# Altium PCB 三人小组v2.PCBDOC
Units mm, origin at the board's own origin, x right, y up, seen from the top; angles counter-clockwise.
Board outline 113.79 x 81.66 mm, 2 copper layers (Top Layer, Bottom Layer); 25 components, 31 nets, 102 pads, 0 vias.
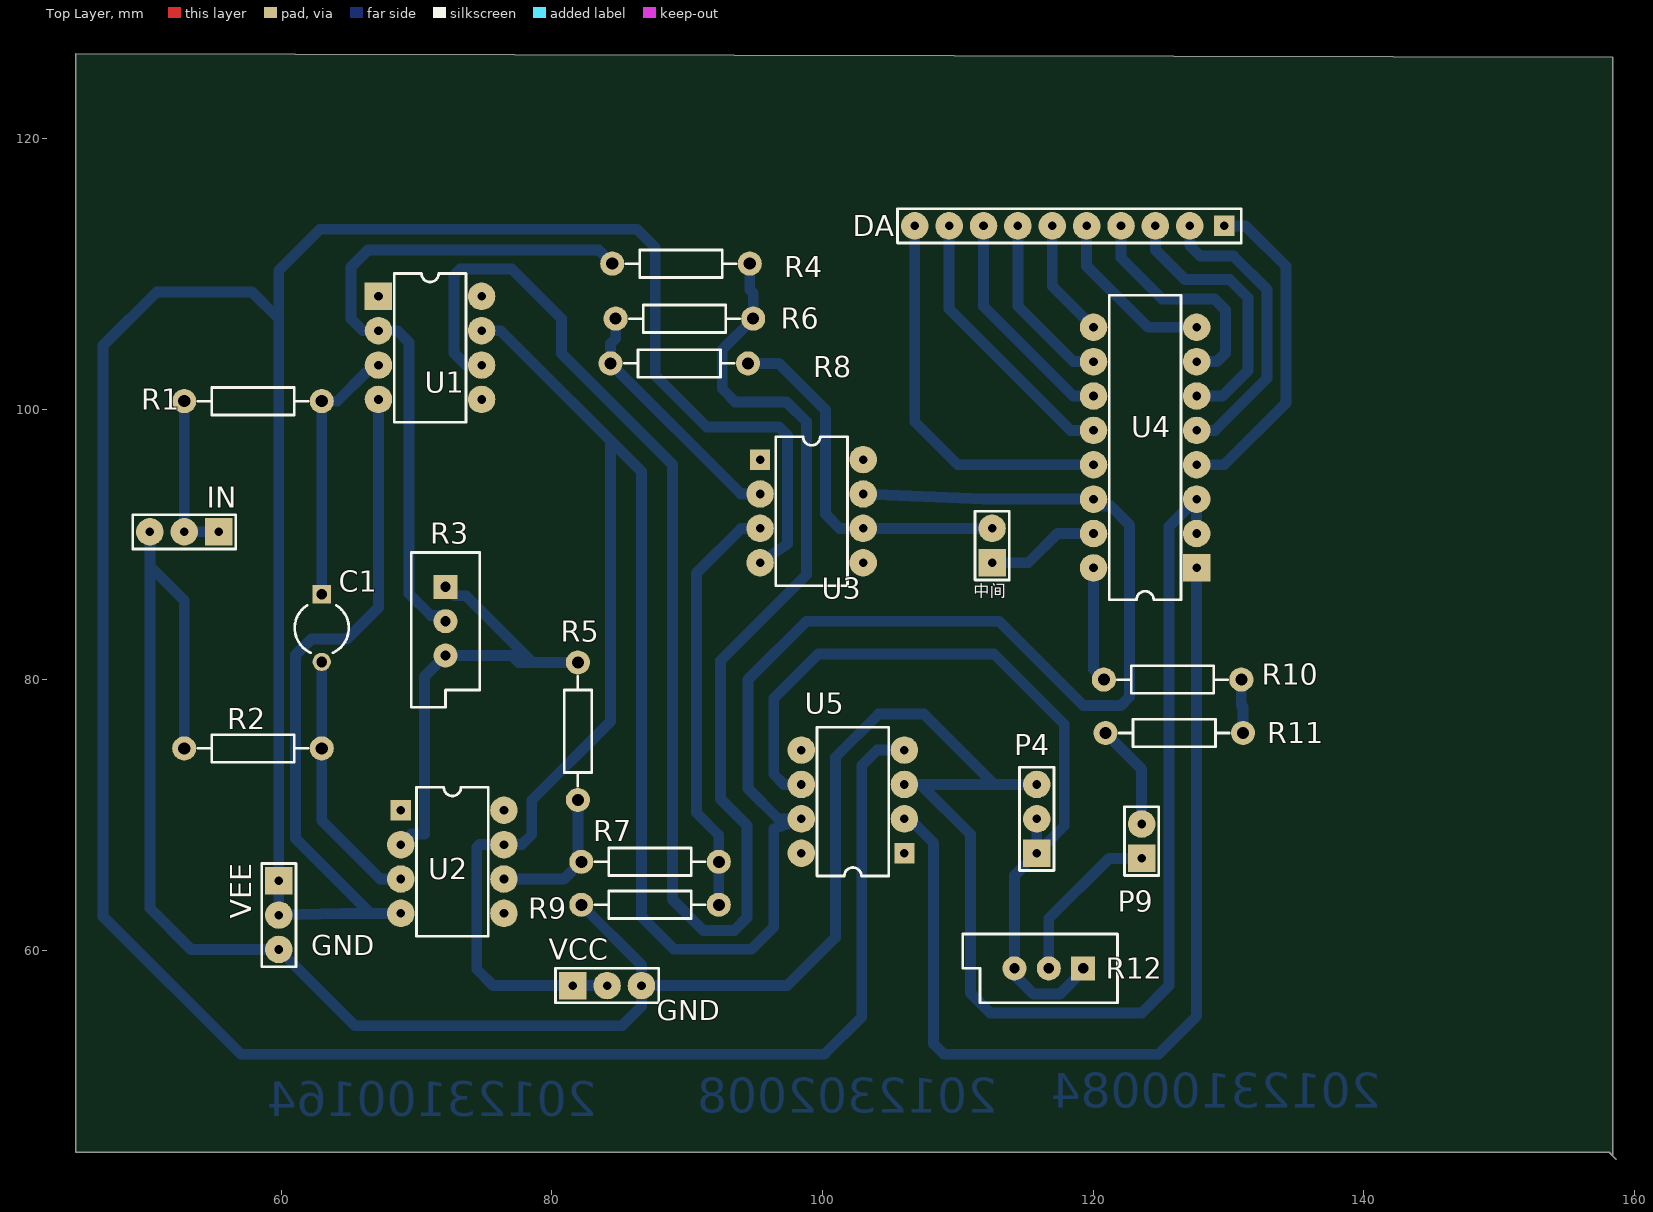
[diagram p0: Top Layer view]
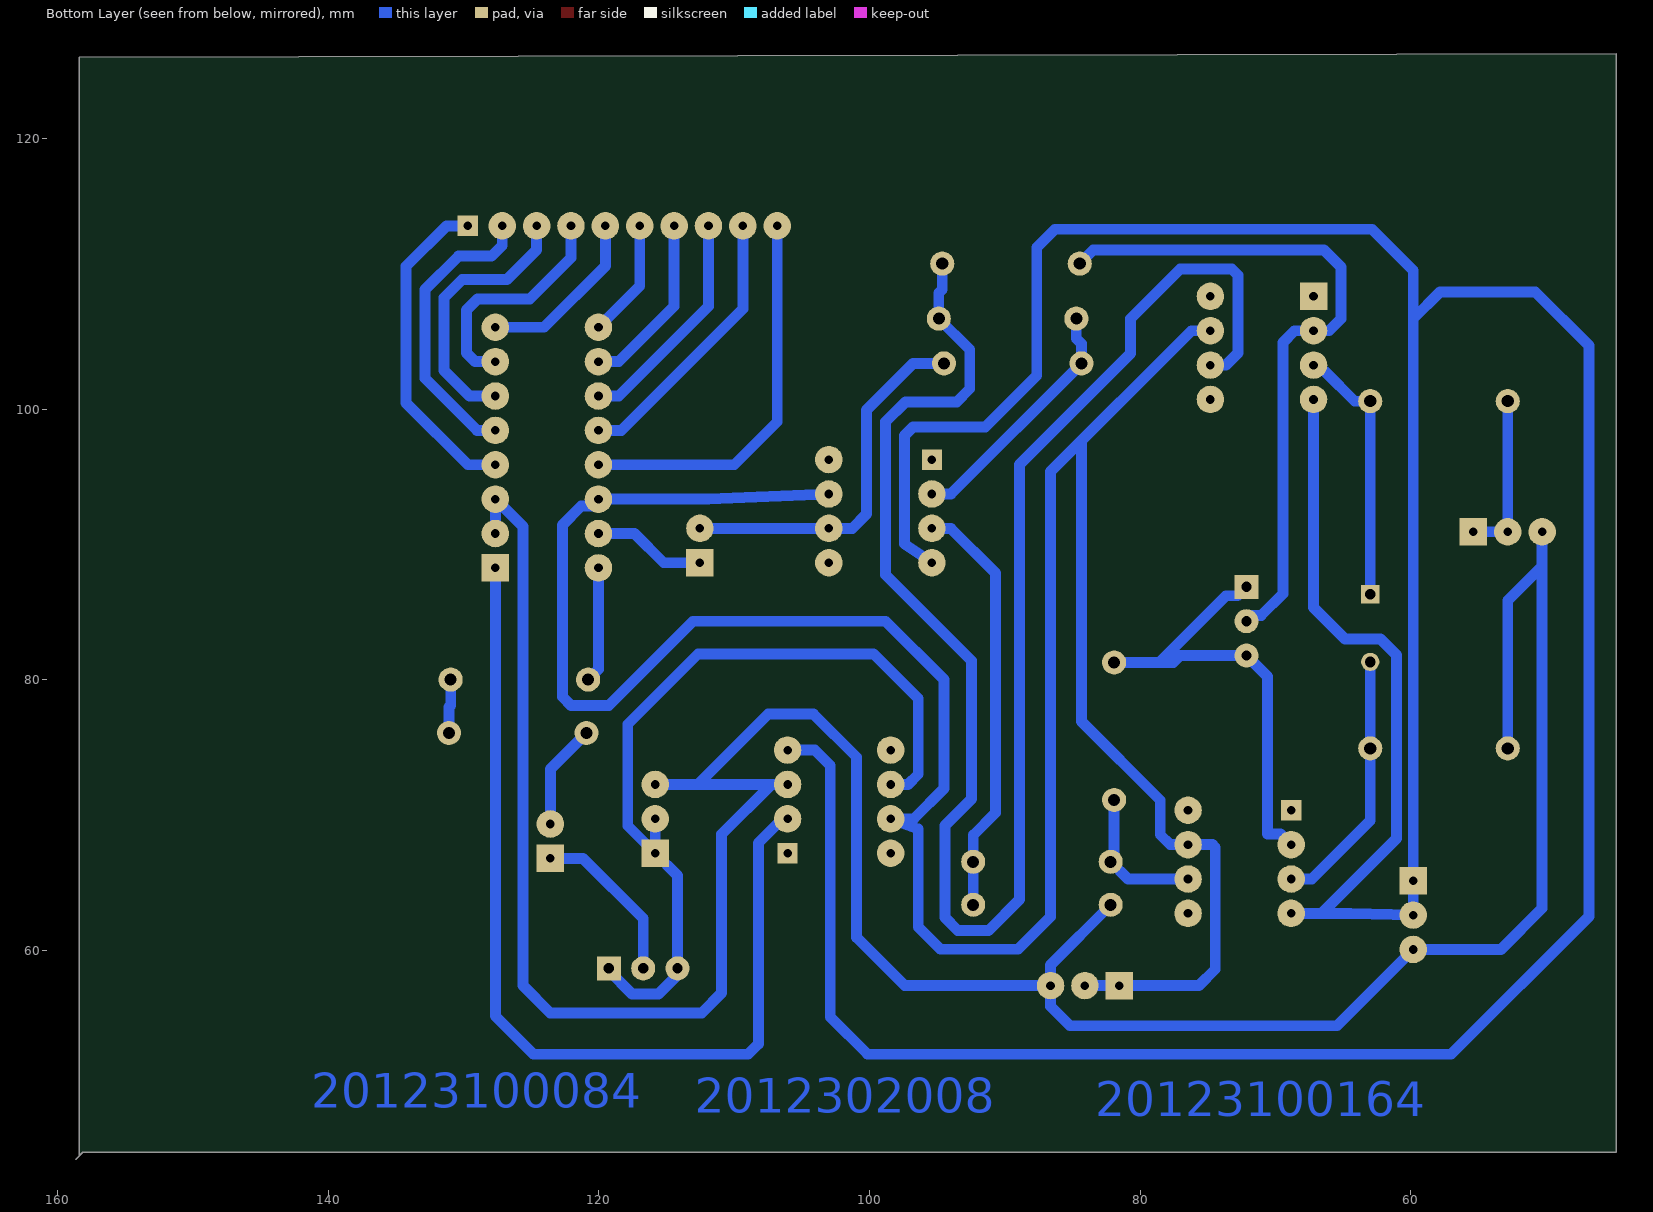
[diagram p1: Bottom Layer view, seen from below]

## Layer stack, top to bottom
Top Layer: signal copper 0.0356
Dielectric: dielectric 0.32, FR-4, Dk 4.8
Bottom Layer: signal copper 0.0356

## Board outline
44.831,126.238 44.831,45.085 158.115,45.085 158.623,44.577 158.369,44.831 158.369,125.984

## Design rules (kind name [scope] priority, off if disabled: settings)
Clearance [All] p1: gap=0.6
FabricationTestPointUsage TestPointUsage [All] p1: valid=0 allowmultiple=FALSE
FabricationTestpoint Testpoint [All] p1: side=3 testpointundercomponent=TRUE minsize=1.016 maxsize=2.54 preferedsize=1.524 minholesize=0 maxholesize=1.016 preferedholesize=0.813 testpointgrid=0.025 allowsidetop=TRUE allowsidebottom=TRUE usegrid=TRUE gridtolerance=0
PolygonConnect [All] p1: connectstyle=Relief reliefconductorwidth=0.254 reliefentries=4 polygonreliefangle="90 Angle" airgapwidth=0.254
RoutingLayers [All] p1: top layer_v5=FALSE bottom layer_v5=TRUE
RoutingVias [All] p1: holewidth=0.711 width=1.27 viastyle="Through Hole" minholewidth=0.711 minwidth=1.27 maxholewidth=0.711 maxwidth=1.27
SolderMaskExpansion [All] p1: expansion=0.102
Width [All] p1: maxlimit=0.8 minlimit=0.8 preferedwidth=0.8
25 further rules are at their usual default settings.

## Components (designator, comment, footprint, x,y, rotation, side; value= is the part's Value field where it differs from the comment)
C1 "Cap2" CAPR5-4X5 62.992,83.82 r270 top
DA "Header 10" HDR1X10 129.667,113.538 r180 top (schematic designator P7)
IN "Header 3" HDR1X3 55.372,90.932 r180 top (schematic designator P1)
P4 "Header 3" HDR1X3 115.824,67.183 r90 top
P9 "Header 2" HDR1X2 123.571,66.802 r90 top
R1 "Res2" AXIAL-0.4 57.912,100.584 r0 top
R2 "Res2" AXIAL-0.4 57.912,74.93 r0 top
R3 "RPot" VR5 72.136,84.328 r270 top
R4 "Res2" AXIAL-0.4 89.535,110.744 r0 top
R5 "Res2" AXIAL-0.4 81.915,76.2 r90 top
R6 "Res2" AXIAL-0.4 89.789,106.68 r180 top
R7 "Res2" AXIAL-0.4 87.249,66.548 r0 top
R8 "Res2" AXIAL-0.4 89.408,103.378 r0 top
R9 "Res2" AXIAL-0.4 87.249,63.373 r0 top
R10 "Res2" AXIAL-0.4 125.857,80.01 r0 top
R11 "Res2" AXIAL-0.4 125.984,76.073 r180 top
R12 "RPot" VR5 116.713,58.674 r180 top
U1 "OP07EP" N-8_A#1 70.993,104.521 r270 top
U2 "OP07EP" N-8_A#2 72.644,66.548 r270 top
U3 "OP07EP" N-8_A#2 99.187,92.456 r270 top
U4 "DAC1020LCN" N16A 123.825,97.155 r90 top
U5 "OP07EP" N-8_A#2 102.235,70.993 r90 top
VCC "Header 3" HDR1X3 81.534,57.404 r0 top (schematic designator P5)
VEE "Header 3" HDR1X3 59.817,65.151 r270 top (schematic designator P6)
中间 "Header 2" HDR1X2 112.522,88.646 r90 top (schematic designator P3)

## Footprints (in the part's own frame and the unit in brackets; to place one, negate y for a bottom-side part, rotate by r counter-clockwise, add the part's x,y. Pads: shape width x height; smd on the part's side, far side on the other; paste and mask are expansions set on the pad)
AXIAL-0.4 [mil] "Resistor; 2 Leads"
  round 70 hole 35: 1(-200,0) 2(200,0)
  silkscreen extent -160,-40 160,40
CAPR5-4X5 [mm] "Capacitor; 2 Leads"
  rect 1.35x1.35 hole 0.8: 1(-2.5,0)
  round 1.35 hole 0.8: 2(2.5,0)
  silkscreen extent -1.69,-2 1.82,2
HDR1X2 [mil] "Connector; Header; 2 Position"
  rect 80x80 hole 25: 1(0,0)
  round 80 hole 25: 2(100,0)
  silkscreen extent -50,-50 150,50
HDR1X3 [mil] "Connector; Header; 3 Position"
  rect 80x80 hole 25: 1(0,0)
  round 80 hole 25: 2(100,0) 3(200,0)
  silkscreen extent -50,-50 250,50
HDR1X10 [mil] "Connector; Header; 10 Position"
  rect 59x59 hole 25: 1(0,0)
  round 80 hole 25: 2(100,0) 3(200,0) 4(300,0) 5(400,0) 6(500,0) 7(600,0) 8(700,0) 9(800,0) 10(900,0)
  silkscreen extent -50,-50 950,50
N16A [mil] "DIP; 16 Leads; Row Spacing 7.62 mm; Pitch 2.54 mm"
  rect 80x80 hole 25: 1(-350,-150)
  round 80 hole 25: 2(-250,-150) 3(-150,-150) 4(-50,-150) 5(50,-150) 6(150,-150) 7(250,-150) 8(350,-150) 9(350,150) 10(250,150) 11(150,150) 12(50,150) 13(-50,150) 14(-150,150) 15(-250,150) 16(-350,150)
  silkscreen extent -443,-104 443,104
N-8_A#1 [mil] "DIP; 8 Leads; Row Spacing 7.62 mm; Pitch 2.54 mm"
  rect 80x80 hole 25: 1(-150,-150)
  round 80 hole 25: 2(-50,-150) 3(50,-150) 4(150,-150) 5(150,150) 6(50,150) 7(-50,150) 8(-150,150)
  silkscreen extent -217,-104 217,104
N-8_A#2 [mil] "DIP; 8 Leads; Row Spacing 7.62 mm; Pitch 2.54 mm"
  rect 59x59 hole 25: 1(-150,-150)
  round 80 hole 25: 2(-50,-150) 3(50,-150) 4(150,-150) 5(150,150) 6(50,150) 7(-50,150) 8(-150,150)
  silkscreen extent -217,-104 217,104
VR5 [mil] "Potentiometer; 3 Leads"
  rect 70x70 hole 30: 1(-100,0)
  round 70 hole 30: 2(0,0) 3(100,0)
  silkscreen extent -200,-100 250,100

## Part data
C1: "Capacitor"
DA: "Header, 10-Pin"
IN P4 VCC VEE: "Header, 3-Pin"
P9 中间: "Header, 2-Pin"
R1 R2 R4 R5 R6 R7 R8 R9 R10 R11: "Resistor"
R3 R12: "Potentiometer"
U1 U2 U3 U5: "Ultra-Low Offset Voltage Operational Amplifier"
U4: "10-Bit Binary Multiplying D/A Converter"

## Nets (pads, with @x,y where several pads share a name; then routed paths per layer and width w, separated by ;. In a path a pad name is that pad's centre, name@x,y a point inside that pad or via, vN(x,y) a via of type N, cw(c..) or ccw(c..) an arc to the next point about the centre after c; other vN are vias at no path point)
GND: IN.3 P4.3 R9.1 U4.2 U4.3 U5.3 VCC.3 VEE.3 | length 210.8
  Bottom Layer w0.8: IN.3 50.292,88.392 ; 52.832,82.804 52.832,85.852 50.292,88.392 ; R9.1 86.614,58.928 VCC.3 ; U5.3 107.239,72.263 ; P4.3 112.674,72.263 ; U4.2 U4.3 125.603,91.313 125.603,57.404 123.584,55.385 112.382,55.385 110.922,56.845 110.922,68.58 107.239,72.263 ; 50.292,88.392 50.292,63.119 53.34,60.071 VEE.3 65.456,54.432 85.166,54.432 86.614,55.88 VCC.3 ; VCC.3 97.384,57.404 100.94,60.96 100.94,74.27 104.14,77.47 107.467,77.47 112.674,72.263 ; 107.239,72.263 112.674,72.263
NetC1_1: C1.1 R1.2 U1.3 | length 19.5
  Bottom Layer w0.8: C1.1 R1.2 64.135,100.584 66.294,102.743 U1.3
NetC1_2: C1.2 R2.2 U2.3 | length 19.4
  Bottom Layer w0.8: C1.2 R2.2 62.992,69.596 67.31,65.278 U2.3
NetP1_1: IN.1 IN.2 R1.1 | length 12.2
  Bottom Layer w0.8: R1.1 IN.2 IN.1
NetP2_2: R2.1 | length 7.9
  Bottom Layer w0.8: R2.1 52.832,82.804
NetP3_1: U4.15 中间.1 | length 8.4
  Bottom Layer w0.8: 中间.1 115.189,88.646 117.348,90.805 U4.15
NetP3_2: R8.2 U3.6 中间.2 | length 27.6
  Bottom Layer w0.8: R8.2 96.774,103.378 100.209,99.943 100.209,92.248 101.271,91.186 U3.6 中间.2
NetP4_1: P4.1 P4.2 R12.1 R12.3 U5.6 | length 62.1
  Bottom Layer w0.8: U5.6 97.155,72.263 96.393,73.025 96.393,78.613 99.695,81.915 112.649,81.915 117.856,76.708 117.856,69.215 P4.1 ; P4.2 P4.1 ; R12.1 119.253,58.507 117.531,56.785 115.57,56.785 114.173,58.182 R12.3 114.173,65.532 P4.1
NetP7_1: DA.1 U4.4 | length 24.4
  Bottom Layer w0.8: U4.4 129.667,95.885 134.229,100.447 134.229,110.551 131.241,113.538 DA.1
NetP7_2: DA.2 U4.5 | length 21.8
  Bottom Layer w0.8: DA.2 127.127,112.087 127.914,111.299 130.356,111.299 132.829,108.827 132.829,102.274 128.98,98.425 U4.5
NetP7_3: DA.3 U4.6 | length 20
  Bottom Layer w0.8: DA.3 124.587,111.76 126.78,109.567 130.082,109.567 131.429,108.22 131.429,102.854 129.54,100.965 U4.6
NetP7_4: DA.4 U4.7 | length 17.3
  Bottom Layer w0.8: DA.4 122.047,111.176 125.095,108.128 128.956,108.128 129.769,107.315 129.769,104.14 129.134,103.505 U4.7
NetP7_5: DA.5 U4.8 | length 13
  Bottom Layer w0.8: DA.5 119.507,110.576 124.038,106.045 U4.8
NetP7_6: DA.6 U4.9 | length 8.8
  Bottom Layer w0.8: DA.6 116.967,109.093 U4.9
NetP7_7: DA.7 U4.10 | length 13.2
  Bottom Layer w0.8: DA.7 114.427,107.594 118.516,103.505 U4.10
NetP7_8: DA.8 U4.11 | length 16.8
  Bottom Layer w0.8: DA.8 111.887,107.594 118.516,100.965 U4.11
NetP7_9: DA.9 U4.12 | length 20.5
  Bottom Layer w0.8: DA.9 109.347,107.417 118.339,98.425 U4.12
NetP7_10: DA.10 U4.13 | length 29
  Bottom Layer w0.8: DA.10 106.807,99.06 109.982,95.885 U4.13
NetP8_1: R10.2 R11.1 | length 4
  Bottom Layer w0.8: R10.2 130.937,78.105 131.064,77.978 R11.1
NetP8_2: P9.1 R12.2 | length 12.4
  Bottom Layer w0.8: R12.2 116.713,62.357 121.158,66.802 P9.1
NetP9_2: P9.2 R11.2 | length 7.8
  Bottom Layer w0.8: R11.2 123.571,73.406 P9.2
NetR3_1: R3.1 R3.3 R5.2 U2.2 | length 34.7
  Bottom Layer w0.8: U2.2 69.621,68.605 70.587,68.605 70.587,80.239 R3.3 77.038,81.788 77.546,81.28 78.588,81.28 ; R3.1 72.796,86.208 73.66,86.208 78.588,81.28 ; R5.2 78.588,81.28
NetR3_2: R3.2 R4.1 U1.2 | length 51.2
  Bottom Layer w0.8: R3.2 71.704,84.76 71.044,84.76 69.444,86.36 69.444,104.927 68.58,105.791 U1.2 66.04,105.791 65.151,106.68 65.151,110.49 66.408,111.747 83.452,111.747 R4.1
NetR4_2: R4.2 R6.1 U1.6 | length 128.6
  Bottom Layer w0.8: U1.6 73.66,103.251 72.771,104.14 72.771,109.89 73.228,110.347 77.029,110.347 80.696,106.68 80.696,104.115 88.9,95.91 88.9,63.77 91.186,61.484 93.472,61.484 94.412,62.424 94.412,69.237 92.456,71.193 92.456,81.407 98.809,87.76 98.809,99.06 97.336,100.533 93.548,100.533 92.583,101.498 92.583,104.394 R6.1 94.869,108.585 94.615,108.839 R4.2
NetR5_1: R5.1 R7.1 U2.6 | length 10.9
  Bottom Layer w0.8: U2.6 80.899,65.278 R7.1 81.915,66.802 R5.1
NetR6_2: R6.2 R8.1 U3.2 | length 18.5
  Bottom Layer w0.8: R6.2 84.709,105.207 84.328,104.826 R8.1 93.98,93.726 U3.2
NetR7_2: R7.2 R9.2 U3.3 | length 31.3
  Bottom Layer w0.8: R9.2 R7.2 92.329,68.517 90.678,70.168 90.678,87.884 93.98,91.186 U3.3
NetR10_1: R10.1 U4.16 | length 8.6
  Bottom Layer w0.8: U4.16 120.015,80.772 R10.1
NetU4_1: U4.1 U5.2 | length 71.7
  Bottom Layer w0.8: U5.2@106.236,69.913 108.204,67.945 108.204,53.086 108.966,52.324 124.816,52.324 127.635,55.143 U4.1
VCC: U1.7 U2.7 U3.7 U4.14 U5.7 VCC.1 VCC.2 | length 203.9
  Bottom Layer w0.8: U1.7 76.2,105.791 86.614,95.377 86.614,62.485 89.015,60.084 94.742,60.084 96.393,61.735 96.393,68.961 U5.7 96.723,69.723 94.488,71.958 94.488,80.01 98.806,84.328 113.03,84.328 119.253,78.105 122.047,78.105 122.682,78.74 122.682,91.44 121.285,92.837 120.523,92.837 U4.14 111.887,93.345 U3.7 ; VCC.2 VCC.1 75.641,57.404 74.438,58.607 74.438,67.614 74.642,67.818 U2.7 77.775,67.818 78.511,68.555 78.511,71.097 84.328,76.913 84.328,97.663
VSS: U1.4 U2.4 U3.4 U5.4 VEE.1 VEE.2 | length 303.4
  Bottom Layer w0.8: U1.4 67.183,85.344 64.846,83.007 62.23,83.007 61.062,81.839 61.062,68.275 66.599,62.738 ; U2.4 66.599,62.738 ; U3.4 97.409,90.043 97.409,98.044 96.774,98.679 91.44,98.679 87.63,102.489 87.63,111.938 86.284,113.284 62.865,113.284 59.817,110.236 59.817,106.68 ; U5.4 104.038,74.803 102.895,73.66 102.895,55.093 100.127,52.324 57.023,52.324 46.838,62.509 46.838,104.699 50.8,108.661 57.836,108.661 59.817,106.68 ; 59.817,106.68 VEE.1 VEE.2 64.465,62.738 66.599,62.738
pads on no net: U1.1 U1.5 U1.8 U2.1 U2.5 U2.8 U3.1 U3.5 U3.8 U5.1 U5.5 U5.8

## Other copper
Bottom Layer:
  text "20123100084" at 141.224,48.387 h2.54
  text "2012302008" at 112.903,48.006 h2.54
  text "20123100164" at 83.312,47.752 h2.54

## Silkscreen, mask and mechanical layers (free items; w line width, h text height)
Top Overlay:
  text "GND" at 62.23,59.182 h2.52
  text "GND" at 87.757,54.356 h2.52